# Altium PCB PCB1.PcbDoc
Units mil, origin at the board's own origin, x right, y up, seen from the top; angles counter-clockwise.
Board outline 5385.03 x 6055.03 mil, 2 copper layers (Top Layer, Bottom Layer); 87 components, 86 nets, 357 pads, 0 vias.
Unrouted connection lines stored in the file: 14.
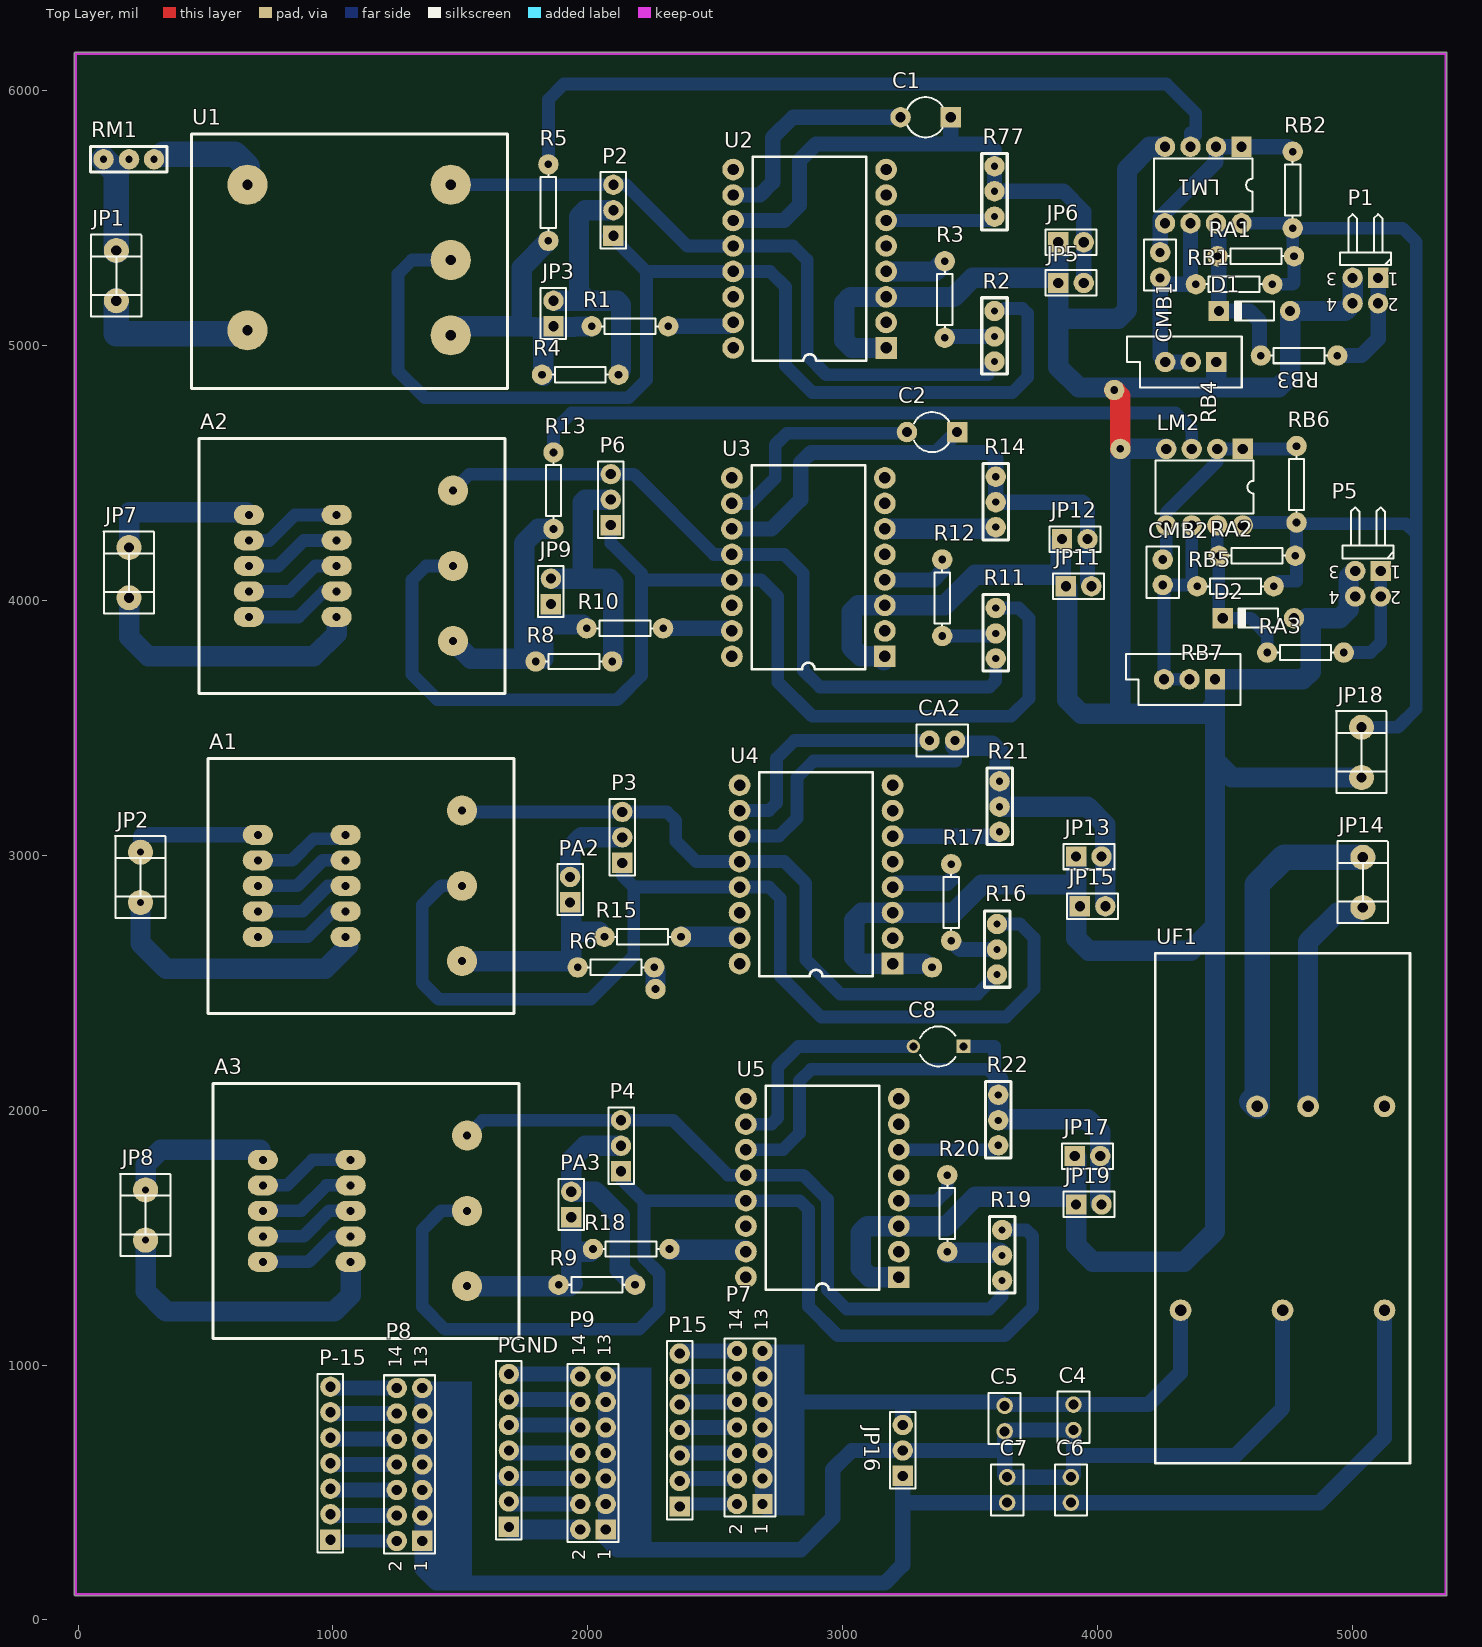
[diagram p0: Top Layer view]
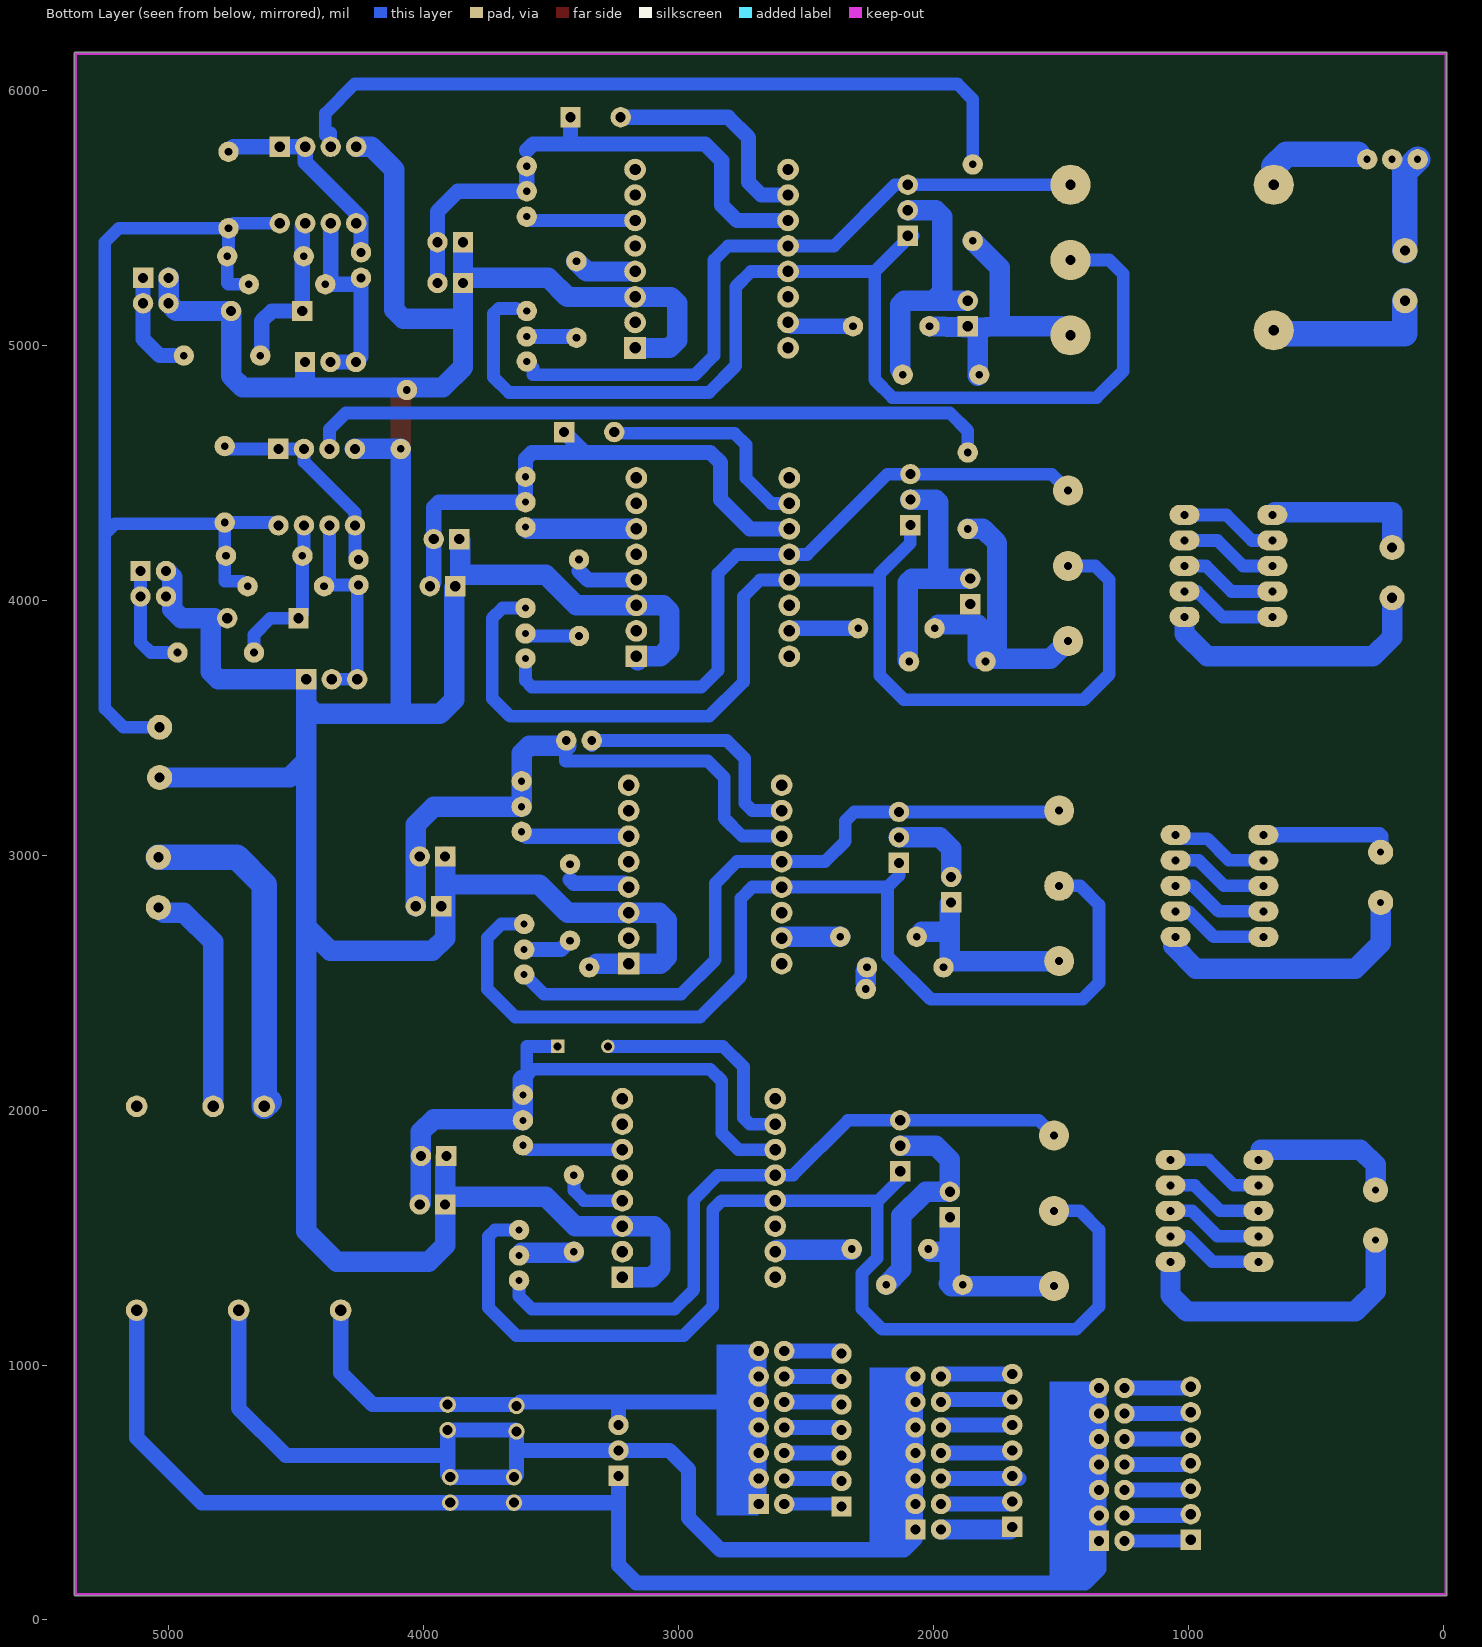
[diagram p1: Bottom Layer view, seen from below]

## Layer stack, top to bottom
Top Solder: solder mask 0.4, Solder Resist, Dk 3.5
Top Layer: signal copper 1.4
Dielectric 1: dielectric 12.6, FR-4, Dk 4.8
Bottom Layer: signal copper 1.4
Bottom Solder: solder mask 0.4, Solder Resist, Dk 3.5

## Board outline
-10,94.99 cw(c-10,100) -15.01,100 -15.01,6145 cw(c-10,6145) -10,6150.02 5365,6150.02 cw(c5365,6145) 5370.02,6145 5370.02,100 cw(c5365,100) 5365,94.99

## Design rules (kind name [scope] priority, off if disabled: settings)
Clearance [All] p1: gap=10
PolygonConnect [All] p1: connectstyle=Relief reliefconductorwidth=10 reliefentries=4 polygonreliefangle="90 Angle" airgapwidth=10
RoutingVias [All] p1: holewidth=28 width=50 viastyle="Through Hole" minholewidth=28 minwidth=50 maxholewidth=28 maxwidth=50
SolderMaskExpansion [All] p1: expansion=4
Width [All] p1: maxlimit=100 minlimit=10 preferedwidth=10
30 further rules are at their usual default settings.

## Components (designator, comment, footprint, x,y, rotation, side; value= is the part's Value field where it differs from the comment)
A1 "CSM025A" csm025a 705,3080 r0 top
A2 "CSM025A" csm025a 670,4335 r0 top
A3 "CSM025A" csm025a 725,1805 r0 top
C1 "47uF" CAPR5-4X5#1 3325,5895 r180 top
C2 "47uF" CAPR5-4X5#1 3350,4660 r180 top
C4 "Cap Pol2" CAPR2.54-5.1x3.2 3905,795 r270 top
C5 "Cap" CAPR2.54-5.1x3.2 3635,790 r90 top
C6 "Cap Pol2" CAPR2.54-5.1x3.2 3895,510 r270 top
C7 "Cap" CAPR2.54-5.1x3.2 3645,510 r90 top
C8 "47uF" CAPR5-4X5#2 3375,2250 r180 top
CA2 "47UF" CAP 3440,3450 r270 top
CMB1 "C" CAP 4245,5265 r180 top
CMB2 "C" CAP 4255,4060 r180 top
D1 "3v3" DIO7.1-3.9x1.9 4615,5135 r180 top
D2 "3v3" DIO7.1-3.9x1.9 4630,3930 r180 top
JP1 "Header 2" tie-in#1 150,5175 r90 top
JP2 "Header 2" tie-in#2 245,2815 r90 top
JP3 "Header 2" HDR1X2 1865,5075 r90 top
JP5 "Header 2" HDR1X2 3845,5245 r0 top
JP6 "" HDR1X2 3845,5405 r0 top
JP7 "Header 2" tie-in#1 200,4010 r90 top
JP8 "Header 2" tie-in#2 265,1490 r90 top
JP9 "Header 2" HDR1X2 1855,3985 r90 top
JP11 "Header 2" HDR1X2 3875,4055 r0 top
JP12 "" HDR1X2 3860,4240 r0 top
JP13 "Header 2" HDR1X2 3915,2995 r0 top
JP14 "" tie-in#1 5040,2795 r90 top
JP15 "" HDR1X2 3930,2800 r0 top
JP16 "Header 3" HDR1X3 3235,565 r90 top
JP17 "Header 2" HDR1X2 3910,1820 r0 top
JP18 "" tie-in#1 5035,3305 r90 top
JP19 "" HDR1X2 3915,1630 r0 top
LM1 "LM393" DIP8 4435,5625 r180 top
LM2 "LM393" DIP8 4440,4440 r180 top
P1 "Header 2X2H" HDR2X2H 5100,5265 r180 top
P2 "Header 3" HDR1X3 2100,5430 r90 top
P3 "Header 3" HDR1X3 2135,2970 r90 top
P4 "Header 3" HDR1X3 2130,1760 r90 top
P5 "Header 2X2H" HDR2X2H 5110,4115 r180 top
P6 "Header 3" HDR1X3 2090,4295 r90 top
P7 "Header 7X2" HDR2X7 2685,455 r90 top
P8 "Header 7X2" HDR2X7 1350,310 r90 top
P9 "Header 7X2" HDR2X7 2070,355 r90 top
P15 "Header 7" HDR1X7 2360,445 r90 top
P-15 "Header 7" HDR1X7 990,315 r90 top
PA2 "Header 2" HDR1X2 1930,2815 r90 top
PA3 "Header 2" HDR1X2 1935,1580 r90 top
PGND "Header 7" HDR1X7 1690,365 r90 top
R1 "147" RES 2315,5075 r90 top
R2 "RPot2" 滑阻 3590,5035 r90 top
R3 "1M" RES 3400,5030 r0 top
R4 "Res2" RES 2120,4885 r90 top
R5 "R" RES 1845,5710 r180 top
R6 "Res2" RES 2260,2560 r90 top
R8 "Res2" RES 2095,3760 r90 top
R9 "Res2" RES 2185,1315 r90 top
R10 "147" RES 2295,3890 r90 top
R11 "RPot2" 滑阻 3595,3870 r90 top
R12 "1M" RES 3390,3860 r0 top
R13 "R" RES 1865,4580 r180 top
R14 "" 滑阻 3595,4385 r90 top
R15 "147" RES 2365,2680 r90 top
R16 "RPot2" 滑阻 3600,2630 r90 top
R17 "1M" RES 3425,2665 r0 top
R18 "147" RES 2320,1455 r90 top
R19 "RPot2" 滑阻 3620,1430 r90 top
R20 "1M" RES 3410,1445 r0 top
R21 "" 滑阻 3610,3190 r90 top
R22 "" 滑阻 3605,1960 r90 top
R77 "102" 滑阻 3600,5605 r270 top
RA1 "R" RES 4470,5350 r270 top
RA2 "R" RES 4475,4175 r270 top
RA3 "res" RES 4665,3795 r270 top
RB1 "R" RES 4685,5240 r90 top
RB2 "R" RES 4765,5760 r180 top
RB3 "100" RES 4940,4960 r90 top
RB4 "504" VR5 4365,4935 r180 top
RB5 "R" RES 4690,4055 r90 top
RB6 "R" RES 4780,4605 r180 top
RB7 "504" VR5 4360,3690 r180 top
RM1 "RPot2" 滑阻 200,5725 r180 top
U1 "VSM025A" vsm025a 664.49,5630 r0 top
U2 "AD637" AD637转接板 3170,4990 r180 top
U3 "AD637" AD637转接板 3165,3780 r180 top
U4 "AD637" AD637转接板 3195,2575 r180 top
U5 "AD637" AD637转接板 3220,1345 r180 top
UF1 "LW010BK84" LW010BK84 4825,2015 r270 top

## Footprints (in the part's own frame and the unit in brackets; to place one, negate y for a bottom-side part, rotate by r counter-clockwise, add the part's x,y. Pads: shape width x height; smd on the part's side, far side on the other; paste and mask are expansions set on the pad)
AD637转接板 [mil]
  rect 85x85 hole 45: 1(0,0)
  round 85 hole 45: 2(0,-100) 3(0,-200) 4(0,-300) 5(0,-400) 6(0,-500) 7(0,-600) 8(0,-700) 9(600,-700) 10(600,-600) 11(600,-500) 12(600,-400) 13(600,-300) 14(600,-200) 15(600,-100) 16(600,0)
  silkscreen extent 78,-750 523,50
CAP [mil]
  round 80 hole 35: 1(0,0) 2(0,-100)
  silkscreen extent -63,-150 63,50
CAPR2.54-5.1x3.2 [mm]
  round 1.65 hole 1: 1(-1.27,0) 2(1.27,0)
  silkscreen extent -2.55,-1.6 2.55,1.6
CAPR5-4X5#1 [mil] "Capacitor; 2 Leads"
  rect 80x80 hole 40: 1(-98.43,0)
  round 80 hole 40: 2(98.43,0)
  silkscreen extent -66,-79 72,79
CAPR5-4X5#2 [mil] "Capacitor; 2 Leads"
  rect 53.15x53.15 hole 31.5: 1(-98.43,0)
  round 53.15 hole 31.5: 2(98.43,0)
  silkscreen extent -66,-79 72,79
csm025a [mm]
  oval 3x2 hole 0.8: 1(0,0) 2(0,-2.54) 3(0,-5.08) 4(0,-7.62) 5(0,-10.16) 6(8.75,-10.16) 7(8.75,-7.62) 8(8.75,-5.08) 9(8.75,-2.54) 10(8.75,0)
  round 3 hole 0.8: 11(20.35,-5.08) 12(20.35,2.42) 13(20.35,-12.58)
  silkscreen extent -4.97,-17.78 25.51,7.62
DIO7.1-3.9x1.9 [mil]
  round 80 hole 40: 1(-139.76,0)
  rect 80x80 hole 40: 2(139.76,0)
  silkscreen extent -77,-37 81,37
DIP8 [mil]
  rect 80x80 hole 40: 1(-129,-154)
  round 80 hole 40: 2(-29,-154) 3(71,-154) 4(171,-154) 5(171,146) 6(71,146) 7(-29,146) 8(-129,146)
  silkscreen extent -172,-108 214,100
HDR1X2 [mil] "Connector; Header; 2 Position"
  rect 80x80 hole 40: 1(0,0)
  round 80 hole 40: 2(100,0)
  silkscreen extent -50,-50 150,50
HDR1X3 [mil] "Connector; Header; 3 Position"
  rect 80x80 hole 40: 1(0,0)
  round 80 hole 40: 2(100,0) 3(200,0)
  silkscreen extent -50,-50 250,50
HDR1X7 [mil] "Connector; Header; 7 Position"
  rect 80x80 hole 40: 1(0,0)
  round 80 hole 40: 2(100,0) 3(200,0) 4(300,0) 5(400,0) 6(500,0) 7(600,0)
  silkscreen extent -50,-50 650,50
HDR2X2H [mil] "Connector; Header; 2x2 Position; Right Angle"
  rect 80x80 hole 40: 1(0,0)
  round 80 hole 40: 2(0,100) 3(100,0) 4(100,100)
  silkscreen extent -50,-250 150,-50
HDR2X7 [mil] "Connector; Header; 7x2 Position"
  rect 80x80 hole 40: 1(0,0)
  round 80 hole 40: 2(0,100) 3(100,0) 4(100,100) 5(200,0) 6(200,100) 7(300,0) 8(300,100) 9(400,0) 10(400,100) 11(500,0) 12(500,100) 13(600,0) 14(600,100)
  silkscreen extent -50,-50 650,150
LW010BK84 [mil]
  round 85 hole 45: 0(0,300) 1(0,0) 2(0,-200) 3(800,300) 4(800,-100) 5(800,-500)
  silkscreen extent -600,-600 1400,400
RES [mil]
  round 80 hole 30: 1(0,0) 2(0,300)
  silkscreen extent -30,41 30,259
tie-in#1 [mm]
  round 2.5 hole 1.016: 1(0,0) 2(5,0)
  silkscreen extent -1.56,-2.5 6.6,2.54
tie-in#2 [mm]
  round 2.5 hole 0.7: 1(0,0) 2(5,0)
  silkscreen extent -1.56,-2.5 6.6,2.54
VR5 [mil] "Thru-Hole; 3 Leads"
  rect 80x80 hole 40: 1(-100,0)
  round 80 hole 40: 2(0,0) 3(100,0)
  silkscreen extent -200,-100 250,100
vsm025a [mm]
  round 4 hole 1.016: 1(0,0) 2(0,-14.5) 3(20.25,-7.5) 4(20.25,0) 5(20.25,-15)
  silkscreen extent -5.59,-20.32 25.91,5.08
滑阻 [mil]
  round 80 hole 28: 1(-98,-5) 2(100,-5) 3(0,-5)
  silkscreen extent -148,-55 152,45

## Part data
C1 C2 C8: library part "Cap Pol1", "Polarized Capacitor (Radial)"
C4 C6: "Polarized Capacitor (Axial)"
C5 C7: "Capacitor"
CA2: library part CAP
CMB1 CMB2: library part CC, "瓷片/无极电容"
D1 D2: library part 稳压二极管
JP1 JP2 JP3 JP5 JP7 JP8 JP9 JP11 JP13 JP17 PA2 PA3: "Header, 2-Pin"
JP6 JP12 JP14 JP15 JP18 JP19: library part "Header 2", "Header, 2-Pin"
JP16 P2 P3 P4 P6: "Header, 3-Pin"
P1 P5: "Header, 2-Pin, Dual row, Right Angle"
P7 P8 P9: "Header, 7-Pin, Dual row"
P15 P-15 PGND: "Header, 7-Pin"
R1 R3 R10 R12 R15 R17 R18 R20: library part Res1, "Resistor"
R2 R11 R16 R19 RM1: "Potentiometer"
R4 R6 R8 R9: "Resistor"
R14 R21 R22 R77: library part RPot2, "Potentiometer"
RB3: library part R, "R"
RB4 RB7: library part RPot, "Potentiometer"

## Free pads (board coordinates)
  round 80 hole 30: 0(4089,4594) 1(4065,4825) 2(2265,2475) 3(3350,2560)

## Nets (pads, with @x,y where several pads share a name; then routed paths per layer and width w, separated by ;. In a path a pad name is that pad's centre, name@x,y a point inside that pad or via, vN(x,y) a via of type N, cw(c..) or ccw(c..) an arc to the next point about the centre after c; other vN are vias at no path point)
+15V: A1.11 A2.11 A3.11 P2.1 P3.1 P4.1 P6.1 P7.2 P15.1 R2.2 R11.2 R16.2 R19.2 U1.3 U2.13 U3.13 U4.13 U5.13 | length 18102.6
  Bottom Layer w50: U1.3@1461.73,5351.73 U1.3 1309.72,5334.72 1255,5280 1255,4900 1360,4795 2160,4795 2230,4865 2230,5290 ; A2.11 1365,4135 1310,4080 1310,3710 1410,3610 2115,3610 2210,3705 2210,4105 2090,4225 P6.1 ; A1.11 1425,2880 1350,2805 1350,2500 1415,2435 2010,2435 2180,2605 2180,2875 ; A3.11@1526.18,1636.18 A3.11 1425,1605 1350,1530 1350,1230 1440,1140 2200,1140 2280,1220 2280,1360 2220,1420 2220,1640 2215,1645 ; P2.1@2080,5430 P2.1 2100,5420 2230,5290 ; P4.1 2130,1730 2215,1645 ; P3.1 2135,2920 2180,2875 ; 2220,4080 U3.13 2680,4080 2745,4015 2745,3680 2880,3545 3660,3545 3730,3615 3730,3930 3690,3970 R11.2 ; P15.1@2380,455 P7.2 ; R16.2 3695,2730 3750,2675 3750,2475 3640,2365 2915,2365 2755,2525 2755,2830 2710,2875 U4.13 2180,2875 ; R19.2 3720,1530 3745,1505 3745,1225 3635,1115 2980,1115 2865,1230 2865,1610 2830,1645 U5.13 2215,1645 ; 3635,5145 3705,5145 3725,5125 3725,4875 3665,4815 2880,4815 2775,4920 2775,5230 2715,5290 U2.13 2230,5290
+15V-OUT: C4.1 C5.2 JP16.3 P7.1 P7.3 P7.5 P7.7 P7.9 P7.11 P7.13 UF1.5 | length 2571.8
  Bottom Layer w60: P7.1 P7.3 P7.5 P7.7 P7.9 ; P7.13 P7.11 P7.9 ; JP16.3@3235,800 3235,855 ; C5.2@3620,855 3235,855 ; C5.2@3640,845 C4.1 4200,845 4325,970 UF1.5 ; P7.9 3235,855
-15V: A1.12 A2.12 A3.12 P2.3 P3.3 P4.3 P6.3 P8.2 P-15.1 R2.1 R11.1 R16.1 R19.1 U1.4 U2.12 U3.12 U4.12 U5.12 | length 11104.9
  Bottom Layer w50: P-15.1@995,310 P8.2 ; U1.4 P2.3 2150,5630 2390,5390 U2.12 2805,5390 2860,5335 2860,4960 2935,4885 3570,4885 R2.1@3570,4912 ; A2.12 1535.91,4495 P6.3 2180,4495 2495,4180 U3.12 2770,4180 2845,4105 2845,3725 2910,3660 3575,3660 3600,3685 R11.1 ; A1.12@1511.46,3170 P3.3 2310,3170 2345,3135 2345,3055 2425,2975 U4.12 2770,2975 2855,2890 2855,2590 2990,2455 3528,2455 R16.1 ; A3.12 1585.91,1960 P4.3 2335,1960 2550,1745 U5.12 2845,1745 2940,1650 2940,1295 3015,1220 3575,1220 3625,1270 R19.1
-15V-OUT: C6.2 C7.1 JP16.1 P8.1 P8.3 P8.5 P8.7 P8.9 P8.11 P8.13 UF1.3 | length 5496.5
  Bottom Layer w60: P8.13 P8.11 P8.9 P8.7 P8.5 P8.3 P8.1 1350,200 1405,145 3165,145 3235,215 3235,470 ; JP16.1 3235,470 ; UF1.3 5125,715 4870,460 C6.2 C7.1 3245,460 3235,470
ADAIN: A2.13 JP9.1 R8.2 R10.2 R13.2 | length 1265.5
  Bottom Layer w80: A2.13 1540.91,3770 1750,3770 ; R13.2 1805,4280 1750,4225 1750,3770 ; R10.2@1980,3905 1825,3905 1825,3770 1750,3770
ADAIN2: A1.13 PA2.1 R6.2 R15.2 | length 761.3
  Bottom Layer w80: A1.13@1516.18,2584.72 1935.28,2584.72 1935.28,2700 ; PA2.1 1935.28,2809.72 1935.28,2700 ; R15.2@2045,2700 1935.28,2700
ADAIN3: A3.13 PA3.1 R9.2 R18.2 | length 740.6
  Bottom Layer w80: A3.13 1929.72,1309.72 ; PA3.1 1935,1445 ; 1940,1320 1935,1325 1935,1445 ; R18.2@2010,1445 1935,1445
ADAOUT: C2.1 JP11.2 JP12.2 R14.2 R14.3 U3.11 | length 2222.2
  Bottom Layer w60: U3.11 2720,4280 2835,4395 2835,4540 2875,4580 3368.43,4580 ; C2.1 3368.43,4580 ; JP11.2 3960,4070 JP12.2 3960,4365 3940,4385 R14.3 R14.2 3600,4555 3575,4580 3368.43,4580
ADAOUT2: CA2.1 JP13.2 JP15.2 R21.2 R21.3 U4.11 | length 2282.3
  Bottom Layer w50: U4.11 2750,3075 2820,3145 2820,3305 2885,3370 3442.5,3370 CA2.1@3442.5,3427.5
  Bottom Layer w80: CA2.1@3440,3430 3585,3430 3615,3400 R21.2 R21.3 3960,3190 4030,3120 JP15.2
ADAOUT3: C8.1 JP17.2 JP19.2 R22.2 R22.3 U5.11 | length 2356.5
  Bottom Layer w50: U5.11 2765,1845 2830,1910 2830,2115 2875,2160 3570,2160 3595,2135 ; C8.1 3595,2250 3595,2135 ; 3610,2120 3595,2135
  Bottom Layer w80: 3610,2120 R22.2 R22.3 3615,1965 3960,1965 4010,1915 JP17.2 JP19.2@4010,1635
ADVIN: JP3.1 R1.2 R4.2 R5.2 U1.5 | length 1136.7
  Bottom Layer w80: U1.5 1497.28,5075 1740,5075 ; R4.2@1825,4880 JP3.1@1825,5070 ; R5.2 1740,5305 1740,5075 ; R1.2 JP3.1@1825,5070 ; 1740,5075 JP3.1@1825,5070
ADVOUT: C1.1 JP5.2 JP6.2 R77.1 R77.3 U2.11 | length 2133.8
  Bottom Layer w60: U2.11 2770,5490 2830,5550 2830,5725 2895,5790 3415,5790 ; C1.1 3423.43,5798.43 3415,5790 ; R77.1@3595,5705 R77.1 R77.3 3865,5605 3945,5525 JP6.2 JP5.2 ; 3595,5765 3570,5790 3415,5790
AGND: D1.1 D2.1 JP3.2 JP5.1 JP6.1 JP9.2 JP11.1 JP12.1 JP13.1 JP15.1 JP17.1 JP18.1 JP19.1 LM1.4 LM2.4 P1.3 P1.4 P2.2 P3.2 P4.2 P5.3 P5.4 P6.2 P9.2 PA2.2 PA3.2 pad.0 pad.1 pad.2 pad.3 PGND.1 R4.1 R6.1 R8.1 R9.1 RB4.1 RB7.1 U2.1 U2.3 U3.1 U3.3 U4.1 U4.3 U5.1 U5.3 | length 19865.2
  Top Layer w80: pad.1 4089,4801 pad.0
  Bottom Layer w80: PGND.1@1700,355 P9.2 ; JP9.2 1985,4085 ; JP3.2 2000,5175 ; PA2.2 1930,3025 1975,3070 P3.2 ; P6.2 1990,4395 1980,4385 1980,4090 1985,4085 ; R8.1@2100,3765 2100,4070 2085,4085 1985,4085 ; P2.2 1990,5530 1965,5505 1965,5210 2000,5175 ; P4.2 1990,1860 1935,1805 PA3.2 2030,1680 2125,1585 2125,1375 R9.1 ; R4.1@2130,4905 2130,5160 2115,5175 2000,5175 ; R6.1 2265,2545 pad.2@2265,2500 ; U3.1@3160,3765 3165,3770 U3.1 3070,3780 3035,3815 3035,3955 3060,3980 U3.3 3400,3980 3520,4100 3855,4100 3855,4235 JP12.1 ; U2.1 3035,4990 3005,5020 3005,5165 3030,5190 U2.3 3435,5190 3510,5265 3825,5265 JP5.1 ; U5.1 3105,1345 3070,1380 3070,1520 3095,1545 U5.3 3405,1545 3520,1660 JP19.1@3885,1660 ; pad.3@3320,2575 U4.1 3070,2575 3045,2600 3045,2745 3075,2775 U4.3 3435,2775 3545,2885 3880,2885 ; JP6.1 JP5.1 ; JP11.1@3880,4050 3880,3610 3935,3555 4095,3555 ; JP17.1@3915,1815 JP19.1 3915,1470 3980,1405 4340,1405 4460,1525 4460,2720 ; JP13.1 3915,2675 3965,2625 4365,2625 4460,2720 ; LM1.4 4204,5779 4115,5690 4115,5140 4080,5105 3845,5105 ; LM2.4 pad.0 4089,3561 4095,3555 ; RB4.1 4465,4840 4460,4835 ; P1.3 P1.4 4970,5135 D1.1 4754.76,4879.76 4710,4835 4460,4835 ; P5.3 4985,4090 4985,3965 4950,3930 4820,3930 4835,3915 4835,3720 4805,3690 RB7.1 4460,3590 ; JP18.1 4525,3305 4460,3370 ; 3845,5105 3845,4915 3925,4835 4460,4835 ; 3845,5105 JP5.1 ; 4095,3555 4425,3555 4460,3590 ; 4460,2720 4460,3370 ; 4460,3370 4460,3590
AGND-OUT: C4.2 C5.1 C6.1 C7.2 JP16.2 P9.1 P9.3 P9.5 P9.7 P9.9 P9.11 P9.13 UF1.4 | length 4617.3
  Bottom Layer w60: P9.13 P9.11 P9.9 P9.7 P9.5 P9.3 P9.1 2070,320 2115,275 2835,275 2960,400 2960,590 3035,665 JP16.2 3605,665 ; C7.2@3635,570 C5.1 ; C5.1@3640,745 C4.2 3905,645 ; C7.2 C6.1 3905,570 3905,645 ; UF1.4 4725,830 4540,645 3905,645
AVCC+5V: JP18.2 LM1.8 LM2.8 RA1.2 RA2.2 RB1.1 RB2.2 RB5.1 RB6.2 | length 4066.3
  Bottom Layer w50: LM1.8 RB2.2@4746,5479 ; LM2.8 4580,4305 RB6.2 ; RB1.1 4765,5240 4770,5245 RA1.2 ; RB5.1@4710,4075 4780,4075 RB6.2 ; RA1.2@4765,5355 RB2.2 5195,5460 5250,5405 5250,4260 ; JP18.2 5176.85,3501.85 5250,3575 5250,4260 ; RB6.2 4785,4300 5210,4300 5250,4260
GND: JP14.1 UF1.1 | length 915.9
  Bottom Layer w80: UF1.1 4825,2660 4940,2775 5020,2775 JP14.1
IS: P5.1 P5.2 RA3.2 | length 441.6
  Bottom Layer w50: RA3.2 5070,3795 5110,3835 P5.2 P5.1
NetA1_1: A1.1 JP2.2 | length 535.2
  Bottom Layer w60: JP2.2 245,3075 250,3080 A1.1@715,3080
NetA1_2: A1.2 A1.10 | length 364.7
  Bottom Layer w50: A1.2@715,2980 840,2980 925,3065 A1.10@1044.49,3065
NetA1_3: A1.3 A1.9 | length 385.9
  Bottom Layer w50: A1.3@715,2880 860,2880 960,2980 A1.9@1059.49,2980
NetA1_4: A1.4 A1.8 | length 385.9
  Bottom Layer w50: A1.4@715,2780 880,2780 980,2880 A1.8@1059.49,2880
NetA1_5: A1.5 A1.7 | length 385.9
  Bottom Layer w50: A1.5@715,2680 900,2680 1000,2780 A1.7@1059.49,2780
NetA1_6: A1.6 JP2.1 | length 1053
  Bottom Layer w80: JP2.1 245,2655 345,2555 970,2555 A1.6@1059.49,2644.49
NetA2_1: A2.1 JP7.2 | length 612.3
  Bottom Layer w80: JP7.2 200,4345 660,4345 A2.1
NetA2_2: A2.2 A2.10 | length 385.9
  Bottom Layer w50: A2.2 750,4235 850,4335 A2.10
NetA2_3: A2.3 A2.9 | length 385.9
  Bottom Layer w50: A2.3 785,4135 885,4235 A2.9
NetA2_4: A2.4 A2.8 | length 385.9
  Bottom Layer w50: A2.4 830,4035 930,4135 A2.8
NetA2_5: A2.5 A2.7 | length 385.9
  Bottom Layer w50: A2.5 865,3935 965,4035 A2.7
NetA2_6: A2.6 JP7.1 | length 1103.1
  Bottom Layer w80: JP7.1 200,3855 275,3780 925,3780 1014.49,3869.49 A2.6
NetA3_1: A3.1 JP8.2 | length 573
  Bottom Layer w80: JP8.2 265,1785 325,1845 715,1845
NetA3_2: A3.2 A3.10 | length 385.9
  Bottom Layer w50: A3.2 820,1705 920,1805 A3.10
NetA3_3: A3.3 A3.9 | length 385.9
  Bottom Layer w50: A3.3 875,1605 975,1705 A3.9
NetA3_4: A3.4 A3.8 | length 385.9
  Bottom Layer w50: A3.4 885,1505 985,1605 A3.8
NetA3_5: A3.5 A3.7 | length 321.4
  Bottom Layer w50: A3.5 905,1405 1005,1505
NetA3_6: A3.6 JP8.1 | length 1194.8
  Bottom Layer w80: JP8.1 265,1290 345,1210 1005,1210 1069.49,1274.49 A3.6
NetC1_2: C1.2 U2.10 | length 885.4
  Bottom Layer w60: U2.10 2675,5590 2725,5640 2725,5815 2805,5895 C1.2
NetC2_2: C2.2 U3.10 | length 835.1
  Bottom Layer w50: U3.10 2635,4380 2735,4480 2735,4610 2780,4655 3210,4655
NetC8_2: C8.2 U5.10 | length 900.1
  Bottom Layer w50: U5.10 2720,1945 2745,1970 2745,2170 2825,2250 C8.2
NetCA2_2: CA2.2 U4.10 | length 969.7
  Bottom Layer w50: U4.10 2710,3175 2740,3205 2740,3380 2810,3450 3320,3450 CA2.2@3340,3430
NetCMB1_1: CMB1.1 LM1.6 RB1.2 RB4.2 RB4.3 | length 771.3
  Bottom Layer w60: CMB1.1 4245,4955 RB4.3 RB4.2 ; CMB1.1@4270,5240 RB1.2 ; RB1.2@4364,5261 LM1.6
NetCMB1_2: CMB1.2 LM1.1 LM1.2 LM1.5 RB2.1 | length 813.6
  Bottom Layer w60: CMB1.2 4245,5500 4464,5719 LM1.2 4746,5779 RB2.1
NetCMB2_1: CMB2.1 LM2.6 RB5.2 RB7.2 RB7.3 | length 813
  Bottom Layer w50: CMB2.1 RB5.2@4385,4060 ; CMB2.1@4260,4055 RB7.3 RB7.2 ; RB5.2@4369,4076 LM2.6
NetCMB2_2: CMB2.2 LM2.1 LM2.2 LM2.5 RB6.1 | length 802.8
  Bottom Layer w50: CMB2.2@4269,4174 LM2.5 4269,4344 4469,4544 LM2.2 RB6.1@4769,4594
NetD1_2: D1.2 LM1.7 RA1.1 RB3.2 | length 646.2
  Bottom Layer w60: LM1.7@4475.24,5467.76 D1.2 4595,5135 4635,5095 4635,4965 RB3.2
NetD2_2: D2.2 LM2.7 RA2.1 RA3.1 | length 614.5
  Bottom Layer w50: RA2.1@4469,4181 LM2.7 ; D2.2@4475,3945.24 RA2.1 ; D2.2 4600,3930 4665,3865 RA3.1
NetJP1_1: JP1.1 U1.2 | length 650.3
  Bottom Layer w100: JP1.1 150,5045 650.35,5045 U1.2
NetJP1_2: JP1.2 RM1.2 RM1.3 | length 378.9
  Bottom Layer w100: RM1.2 150,5680 JP1.2
NetLM1_3: LM1.3 R5.1 | length 3007.5
  Bottom Layer w50: R5.1 1845,5965 1905,6025 4270,6025 4385,5910 4385,5825 ; LM1.3 4364,5834
NetLM2_3: LM2.3 R13.1 | length 2721.5
  Bottom Layer w50: R13.1 1865,4665 1935,4735 4305,4735 4369,4671 LM2.3
NetP7_4: P7.4 P15.2 | length 215
  Bottom Layer w60: P15.2@2370,555 P7.4
NetP7_6: P7.6 P15.3 | length 215
  Bottom Layer w60: P15.3@2370,655 P7.6
NetP7_8: P7.8 P15.4 | length 215
  Bottom Layer w60: P15.4@2370,755 P7.8
NetP7_10: P7.10 P15.5 | length 215
  Bottom Layer w60: P15.5@2370,855 P7.10
NetP7_12: P7.12 P15.6 | length 215
  Bottom Layer w60: P15.6@2370,955 P7.12
NetP7_14: P7.14 P15.7 | length 215
  Bottom Layer w60: P15.7@2370,1055 P7.14
NetP8_4: P8.4 P-15.2 | length 255
  Bottom Layer w60: P-15.2@995,410 P8.4
NetP8_6: P8.6 P-15.3 | length 255
  Bottom Layer w60: P-15.3@995,510 P8.6
NetP8_8: P8.8 P-15.4 | length 255
  Bottom Layer w60: P-15.4@995,610 P8.8
NetP8_10: P8.10 P-15.5 | length 255
  Bottom Layer w60: P-15.5@995,710 P8.10
NetP8_12: P8.12 P-15.6 | length 255
  Bottom Layer w60: P-15.6@995,810 P8.12
NetP8_14: P8.14 P-15.7 | length 255
  Bottom Layer w60: P-15.7@995,910 P8.14
NetP9_4: P9.4 PGND.2 | length 270
  Bottom Layer w60: PGND.2@1700,455 P9.4
NetP9_6: P9.6 PGND.3 | length 305
  Bottom Layer w60: PGND.3@1665,555 P9.6
NetP9_8: P9.8 PGND.4 | length 270
  Bottom Layer w60: PGND.4@1700,655 P9.8
NetP9_10: P9.10 PGND.5 | length 270
  Bottom Layer w60: PGND.5 P9.10@1960,765
NetP9_12: P9.12 PGND.6 | length 270
  Bottom Layer w60: PGND.6 P9.12@1960,865
NetP9_14: P9.14 PGND.7 | length 270
  Bottom Layer w60: PGND.7 P9.14@1960,965
NetR1_1: R1.1 U2.15 | length 261.2
  Bottom Layer w60: R1.1 2555,5075 U2.15
NetR2_3: R2.3 R3.1 | length 195
  Bottom Layer w60: R3.1@3400,5035 R2.3
NetR3_2: R3.2 U2.4 | length 246.6
  Bottom Layer w80: U2.4 3360,5290 R3.2
NetR10_1: R10.1 U3.15 | length 260
  Bottom Layer w60: R10.1 U3.15@2555,3890
NetR11_3: R11.3 R12.1 | length 200
  Bottom Layer w50: R12.1 R11.3@3590,3860
NetR12_2: R12.2 U3.4 | length 239.5
  Bottom Layer w60: U3.4 3355,4080 3390,4115
NetR14_1: R14.1 U3.6 | length 428
  Bottom Layer w80: U3.6 R14.1@3593,4280
NetR15_1: R15.1 U4.15 | length 225
  Bottom Layer w80: R15.1 U4.15@2590,2680
NetR16_3: R16.3 R17.1 | length 194.5
  Bottom Layer w60: R17.1 3460,2630 R16.3
NetR17_2: R17.2 U4.4 | length 242.4
  Bottom Layer w60: U4.4 3210,2890 3410,2890 3425,2905
NetR18_1: R18.1 U5.15 | length 295
  Bottom Layer w80: R18.1 2320,1452.5 U5.15@2612.5,1452.5
NetR19_3: R19.3 R20.1 | length 210
  Bottom Layer w80: R20.1 3410,1440 R19.3@3615,1440
NetR20_2: R20.2 U5.4 | length 266.6
  Bottom Layer w50: U5.4 3370,1645 3410,1685 R20.2
NetR21_1: R21.1 U4.6 | length 403
  Bottom Layer w60: U4.6 R21.1@3598,3075
NetR22_1: R22.1 U5.6 | length 397
  Bottom Layer w50: U5.6 3593,1845 R22.1
NetR77_2: R77.2 U2.6 | length 410
  Bottom Layer w50: U2.6 R77.2@3580,5490
NetRM1_1: RM1.1 U1.1 | length 420.5
  Bottom Layer w100: 335,5750 615,5750 664.49,5700.51 U1.1
VCC: JP14.2 UF1.2 | length 1357.5
  Bottom Layer w100: UF1.2@4605,2035 UF1.2 4625,2885 4731.85,2991.85 JP14.2
VS: P1.1 P1.2 RB3.1 | length 426.9
  Bottom Layer w60: RB3.1 5035,4960 5100,5025 P1.2 P1.1
pads on no net: U2.2 U2.5 U2.7 U2.8 U2.9 U2.14 U2.16 U3.2 U3.5 U3.7 U3.8 U3.9 U3.14 U3.16 U4.2 U4.5 U4.7 U4.8 U4.9 U4.14 U4.16 U5.2 U5.5 U5.7 U5.8 U5.9 U5.14 U5.16 UF1.0

## Keep-outs
Keep-Out Layer:
  lines w10: -10,100 5365,100 5365,6145 -10,6145 -10,100

## Other copper
Bottom Layer:
  rectangle net -15V-OUT: 1365,160 1545,935
  rectangle net AGND-OUT: 2060,290 2250,990
  rectangle net +15V-OUT: 2685,410 2850,1080

## Text inside footprints (layer, text, board x,y; h text height)
P1: Top Overlay "1" at 5180,5285 h50 r180; Top Overlay "2" at 5180,5185 h50 r180; Top Overlay "4" at 4940,5185 h50 r180; Top Overlay "3" at 4940,5285 h50 r180
P5: Top Overlay "3" at 4950,4135 h50 r180; Top Overlay "4" at 4950,4035 h50 r180; Top Overlay "2" at 5190,4035 h50 r180; Top Overlay "1" at 5190,4135 h50 r180
P7: Top Overlay "13" at 2705,1135 h50 r90; Top Overlay "14" at 2605,1135 h50 r90; Top Overlay "1" at 2705,335 h50 r90; Top Overlay "2" at 2605,335 h50 r90
P8: Top Overlay "13" at 1370,990 h50 r90; Top Overlay "14" at 1270,990 h50 r90; Top Overlay "1" at 1370,190 h50 r90; Top Overlay "2" at 1270,190 h50 r90
P9: Top Overlay "13" at 2090,1035 h50 r90; Top Overlay "14" at 1990,1035 h50 r90; Top Overlay "1" at 2090,235 h50 r90; Top Overlay "2" at 1990,235 h50 r90